# EAGLE board dual_pol_balun_multilayer (EAGLE 9.6.2)

Size 54.55 x 48.55 mm. Coordinates in mm from the lower left corner, seen from the top.
Outline: 45.55,47.27 45.55,48.27 arc90 45.27,48.55 17.27,48.55 arc90 17,48.27 17,47.27 arc-90 9.28,39.55 0.28,39.55 arc90 0,39.27 0,9.28 arc90 0.28,9 1.27,9 arc-90 9,1.27 9,0.28 arc90 9.28,0 37.27,0 arc90 37.55,0.28 37.55,1.27 arc-90 45.27,9 54.27,9 arc90 54.55,9.28 54.55,39.27 arc90 54.27,39.55 53.27,39.55 arc-90 45.55,47.27
Outline: circle at 43.28,44.28 radius 1.75
Outline: circle at 11.28,4.28 radius 1.75
Copper layers ([2:1*(2*15)*16:15]): Top 0.035559375mm / dielectric 0.17018125mm / Route2 0.01778125mm / dielectric 47mil / Route15 0.01778125mm / dielectric 0.17018125mm / Bottom 0.035559375mm
Design rules "oshpark-4layer *": minimum track width 5mil, minimum drill 10mil, track to track 5mil, track to pad 5mil, pad to pad 5mil, via to via 5mil, smd to smd 5mil, copper to edge 15mil, drill to drill 6mil, minimum pad ring 4mil, minimum via ring 4mil, stop-mask expansion 2.5mil, vias tented up to drill 0mil, thermal gap 10mil

## Footprints (pad centres in the part's own frame; a part is rotated, then mirrored left to right if it is on the bottom)
ADT11WT = smd 1.65 x 2.54: 1 -2.54,-2.54; 2 0,-2.54; 3 2.54,-2.54; 4 2.54,2.54; 5 0,2.54; 6 -2.54,2.54
J502-ND-142-0701-801/806 = smd 5.08 x 2.286: 1 2.565,0; G@1 2.565,4.42; G@2 2.565,-4.42 | smd 5.08 x 2.286 bottom: G@3 2.565,4.42; G@4 2.565,-4.42

## Placement (x,y rotation side)
T1  ADT1-1WT+  [ADT11WT]  27.3,26.67 270 top
T2  ADT1-1WT+  [ADT11WT]  26.67,26.67 270 bottom
X1  SMA-142-0701-801/806  [J502-ND-142-0701-801/806]  0,25.4 0 top
X2  SMA-142-0701-801/806  [J502-ND-142-0701-801/806]  27.94,48.9 270 top
X3  SMA-142-0701-801/806  [J502-ND-142-0701-801/806]  27.3,0 90 top
X4  SMA-142-0701-801/806  [J502-ND-142-0701-801/806]  54.61,25.4 0 bottom
X5  SMA-142-0701-801/806  [J502-ND-142-0701-801/806]  27.94,48.9 270 bottom
X6  SMA-142-0701-801/806  [J502-ND-142-0701-801/806]  27.3,0 90 bottom

## Library data of the parts
T1 T2 = ADT1-1WT+; ARROW_PART_NUMBER: ADT1-1WT+; DESCRIPTION: RF Transformer; HEIGHT: 2.84mm; MANUFACTURER_NAME: Mini-Circuits; MANUFACTURER_PART_NUMBER: ADT1-1WT+; MOUSER_PART_NUMBER: 139-ADT1-1WT; MOUSER_PRICE-STOCK: https://www.mouser.co.uk/ProductDetail/Mini-Circuits/ADT1-1WT%2b?qs=xZ%2FP%252Ba9zWqYbLxnb6qhNYw%3D%3D
X1-X6 = con-coax_flange_mount_edit; MF: JOHNSON COMPONENTS; MPN: 142-0701-801; OC_FARNELL: 1608592; OC_NEWARK: 90F2624

## Nets
GND: T1.3 T2.3 X1.G@1 X1.G@2 X1.G@3 X1.G@4 X2.G@1 X2.G@2 X2.G@3 X2.G@4 X3.G@1 X3.G@2 X3.G@3 X3.G@4 X4.G@1 X4.G@2 X4.G@3 X4.G@4 X5.G@1 X5.G@2 X5.G@3 X5.G@4 X6.G@1 X6.G@2 X6.G@3 X6.G@4
N$1: T1.1 X1.1
N$2: T1.6 X2.1
N$3: T1.4 X3.1
N$5: T2.1 X4.1
N$7: T2.6 X5.1
N$8: T2.4 X6.1

## Tracks (layer width: path | path; a pad name or v marks a point on that pad's centre or on a via)
GND  (25 unrouted)
N$1  (1 unrouted)
N$2  (1 unrouted)
N$3  (1 unrouted)
N$5  (1 unrouted)
N$7  (1 unrouted)
N$8  (1 unrouted)